# Altium PCB ComboCamera_OV2640.PcbDoc (part 2 of 2)
Units mm, origin at the board's own origin, x right, y up, seen from the top; angles counter-clockwise.
Board outline 54.59 x 25.9 mm, 4 copper layers (L1, L2, L3, L4), stack 1.562 mm thick; 63 components, 49 nets, 203 pads, 112 vias.
Unrouted connection lines stored in the file: 172.
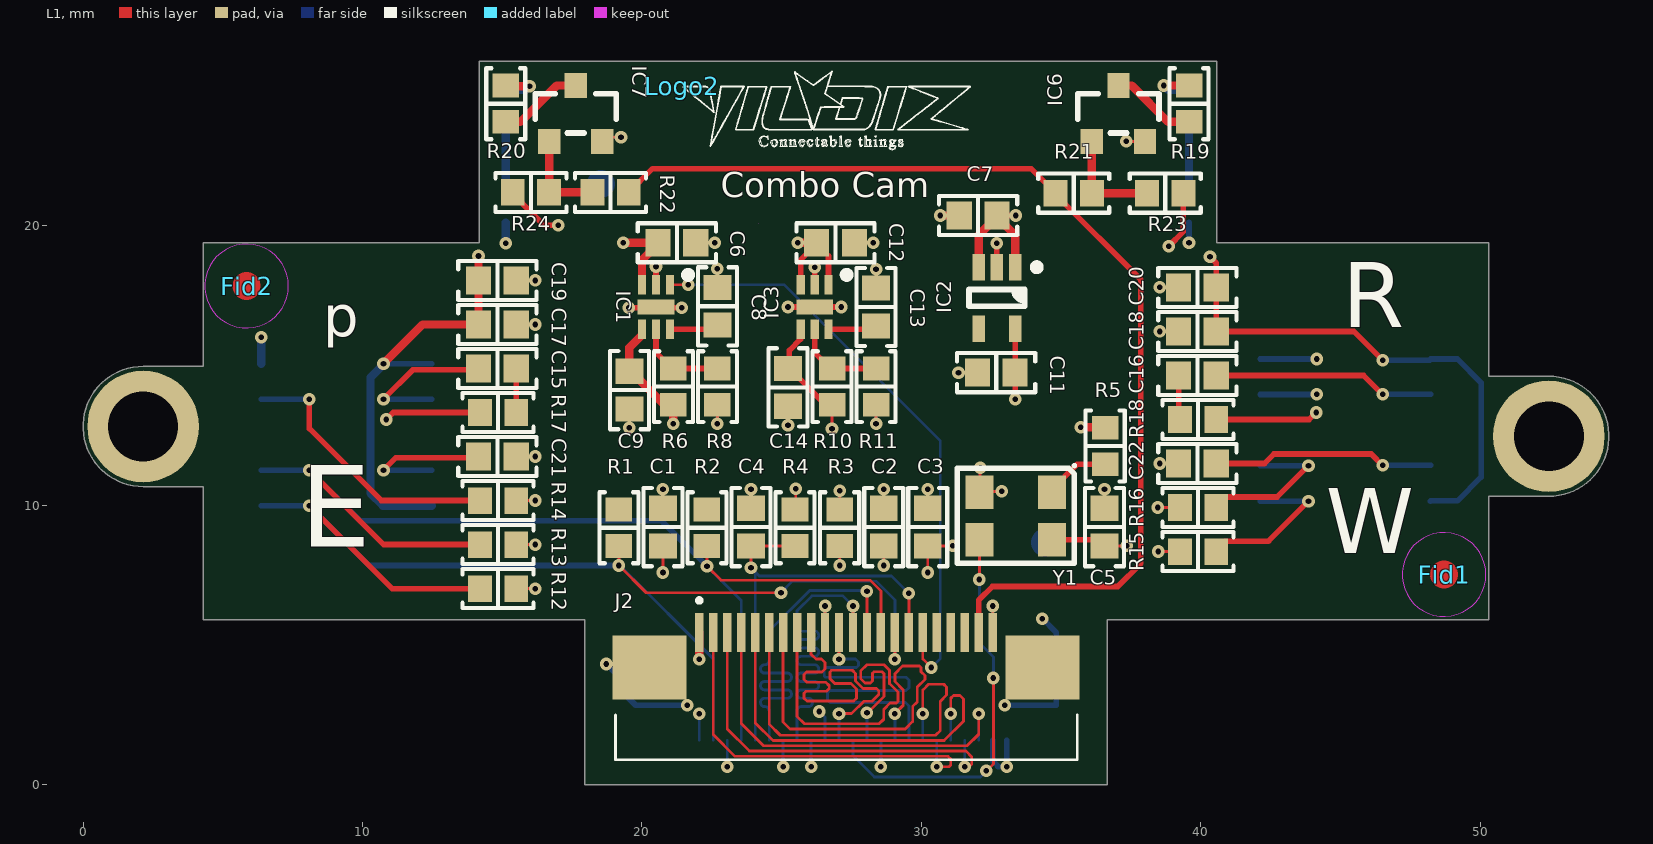
[diagram p0: L1 view]

## Via types
v1: diameter 0.45, hole 0.2, L1 to L4, tented both sides, 112 vias

## Nets (pads, with @x,y where several pads share a name; then routed paths per layer and width w, separated by ;. In a path a pad name is that pad's centre, name@x,y a point inside that pad or via, vN(x,y) a via of type N, cw(c..) or ccw(c..) an arc to the next point about the centre after c; other vN are vias at no path point) (continued)
NetC16_1: (continued)
  L1 w0.2: C16.1 39.2,13.125 R18.2
NetC16_2: C16.2 IC5.10 | length 7.9
  L1 w0.2: C16.2 45.825,14.65 v1(46.5,13.975)
  L4 w0.2: v1(46.5,13.975) IC5.10@48.22,13.975
NetC21_1: C21.1 IC4.12 | length 5.3
  L1 w0.2: v1(10.75,11.265) 11.185,11.7 C21.1@14.15,11.7
  L4 w0.2: v1(10.75,11.265) IC4.12@12.47,11.265
NetC22_1: C22.1 IC5.12 | length 8
  L1 w0.2: C22.1 42.275,11.5 42.614,11.839 46.096,11.839 v1(46.5,11.435)
  L4 w0.2: v1(46.5,11.435) IC5.12@48.22,11.435
NetD1_2: D1.2 D3.1 | length 1.7
  L4 w0.3: D1.2 D3.1
NetD2_2: D2.2 D4.1 | length 1.7
  L4 w0.3: D2.2 D4.1
NetD3_2: D3.2 R19.2 | length 1.9
  L1 w0.3: v1(38.675,25.025) R19.2
  L4 w0.3: v1(38.675,25.025) 38.825,24.875 D3.2
NetD4_2: D4.2 R20.2 | length 1.8
  L1 w0.3: R20.2 15.15,25 v1(15.975,25)
  L4 w0.3: D4.2 15.85,24.875 v1(15.975,25)
NetIC1_5: IC1.5 R6.1 R8.1 | length 3.2
  L1 w0.2: IC1.5 20.5,15.475 R6.1@21.075,14.9 ; R6.1 R8.1
NetIC3_5: IC3.5 R10.1 R11.1 | length 3.3
  L1 w0.2: IC3.5 26.175,15.475 26.75,14.9 R10.1 R11.1
NetIC4_1: IC4.1 IC4.7 IC4.8 IC4.11 IC4.14
NetIC4_5: IC4.5 R14.1 | length 9.9
  L1 w0.2: v1(8.1,13.795) 8.1,12.75 10.675,10.175 R14.1
  L4 w0.2: IC4.5@6.38,13.795 v1(8.1,13.795)
NetIC5_1: IC5.1 IC5.7 IC5.8 IC5.11 IC5.14
NetIC6_1: IC6.1 R21.2 R23.1 | length 3.8
  L1 w0.3: IC6.1 R21.2 R23.1
NetIC6_3: IC6.3 R19.1 | length 3.1
  L1 w0.3: IC6.3 37.525,25.025 38.825,23.725 R19.1
NetIC7_1: IC7.1 R22.2 R24.1 | length 3.4
  L1 w0.3: IC7.1 R24.1 R22.2
NetIC7_3: IC7.3 R20.1 | length 3
  L1 w0.3: R20.1 15.65,23.725 16.95,25.025 IC7.3
NetJ1_8: J1.8 R3.2 | length 9.7
  L1 w0.1: v1(27.075,7.85) R3.2
  L3 w0.1: v1(25.05,0.65) 25.05,5.825 v1(27.075,7.85)
  L4 w0.1: v1(25.05,0.65) J1.8
NetR5_2: R5.2 Y1.1 | length 2.4
  L1 w0.2: Y1.1 34.675,10.575 35.575,11.475 R5.2
SPI_MISO: J2.19
SPI_MOSI: J2.20
SPI_SCL: J2.18
VIO: R1.2 R2.2
pads on no net: IC2.4 IC4.4 IC5.4 J1.1

## Polygon pours and split planes (outlines as drawn)
GND on L3 "L3-GND" (solid, pour order 0): 4.3,5.9 4.3,10.675 2.15,10.675 cw(c2.15,12.825) 2.15,14.975 4.3,14.975 4.3,19.4 14.175,19.4 14.175,25.9 40.575,25.9 40.575,19.4 50.3,19.4 50.3,14.625 52.45,14.625 cw(c52.45,12.475) 52.45,10.325 50.3,10.325 50.3,5.9 36.65,5.9 36.65,0 17.95,0 17.95,5.9
3v on L2 "L2-3v" (solid, pour order 2): 4.3,5.9 4.3,10.675 2.15,10.675 cw(c2.15,12.825) 2.15,14.975 4.3,14.975 4.3,19.4 14.175,19.4 14.175,25.9 40.575,25.9 40.575,19.4 50.3,19.4 50.3,14.625 52.45,14.625 cw(c52.45,12.475) 52.45,10.325 50.3,10.325 50.3,5.9 36.65,5.9 36.65,0 17.95,0 17.95,5.9

## Keep-outs
L1:
  region: 24.175,20.075

## Other copper
L2:
  pour cut-out: 25.475,0.5 25.8,0.175 26.8,0.175 28.6,1.975 28.6,2.85 30.526,4.776 30.524,7.95 30.45,7.95 29.925,7.95 29.925,4.725 28.264,3.064 28.264,2.143 26.605,0.484 25.95,0.484 25.95,1.175 26.675,1.9 26.675,2.891 26.025,2.891 26.025,1.825 25.475,1.275

## Silkscreen, mask and mechanical layers (free items; w line width, h text height)
Top Overlay:
  text "Combo Cam" at 22.825,20.725 h1.52
  text "R" at 45.05,15.6 h4
  text "p" at 8.6,15.575 h2.5
  text "E" at 7.775,7.55 h5
  text "W" at 44.475,7.525 h4
Bottom Overlay:
  lines w0.1: 24.3,12.9 30.3,18.9 ; 24.3,12.9 24.3,18.9 ; 24.3,12.9 30.3,12.9 ; 24.3,18.9 30.3,12.9 ; 24.3,18.9 30.3,18.9 ; 30.3,12.9 30.3,18.9
  text "Combo Cam" at 30.75,20.725 h1.52
  text "R" at 36.8,20.725 h4
  text "p" at 37.175,19 h2.5
  text "6mm" at 26.15,18.6 h1 r180
  text "6mm" at 29.975,17.025 h1 r90
  text "6mm" at 24.625,14.725 h1 r270
  text "6mm" at 28.25,13.175 h1
  text "E" at 19.825,10.925 h5
  text "W" at 39.475,10.725 h4
Mechanical 1:
  lines w0.1: 4.3,5.9 4.3,10.675 2.15,10.675 cw(c2.15,12.825) 2.15,14.975 4.3,14.975 4.3,19.4 14.175,19.4 14.175,25.9 40.575,25.9 40.575,19.4 50.3,19.4 50.3,14.625 52.45,14.625 cw(c52.45,12.475) 52.45,10.325 50.3,10.325 50.3,5.9 36.65,5.9 36.65,0 17.95,0 17.95,5.9 4.325,5.9